# EAGLE board begin5matrix1.3whaha met snel makenjuhkuhjigb (EAGLE 5.06)
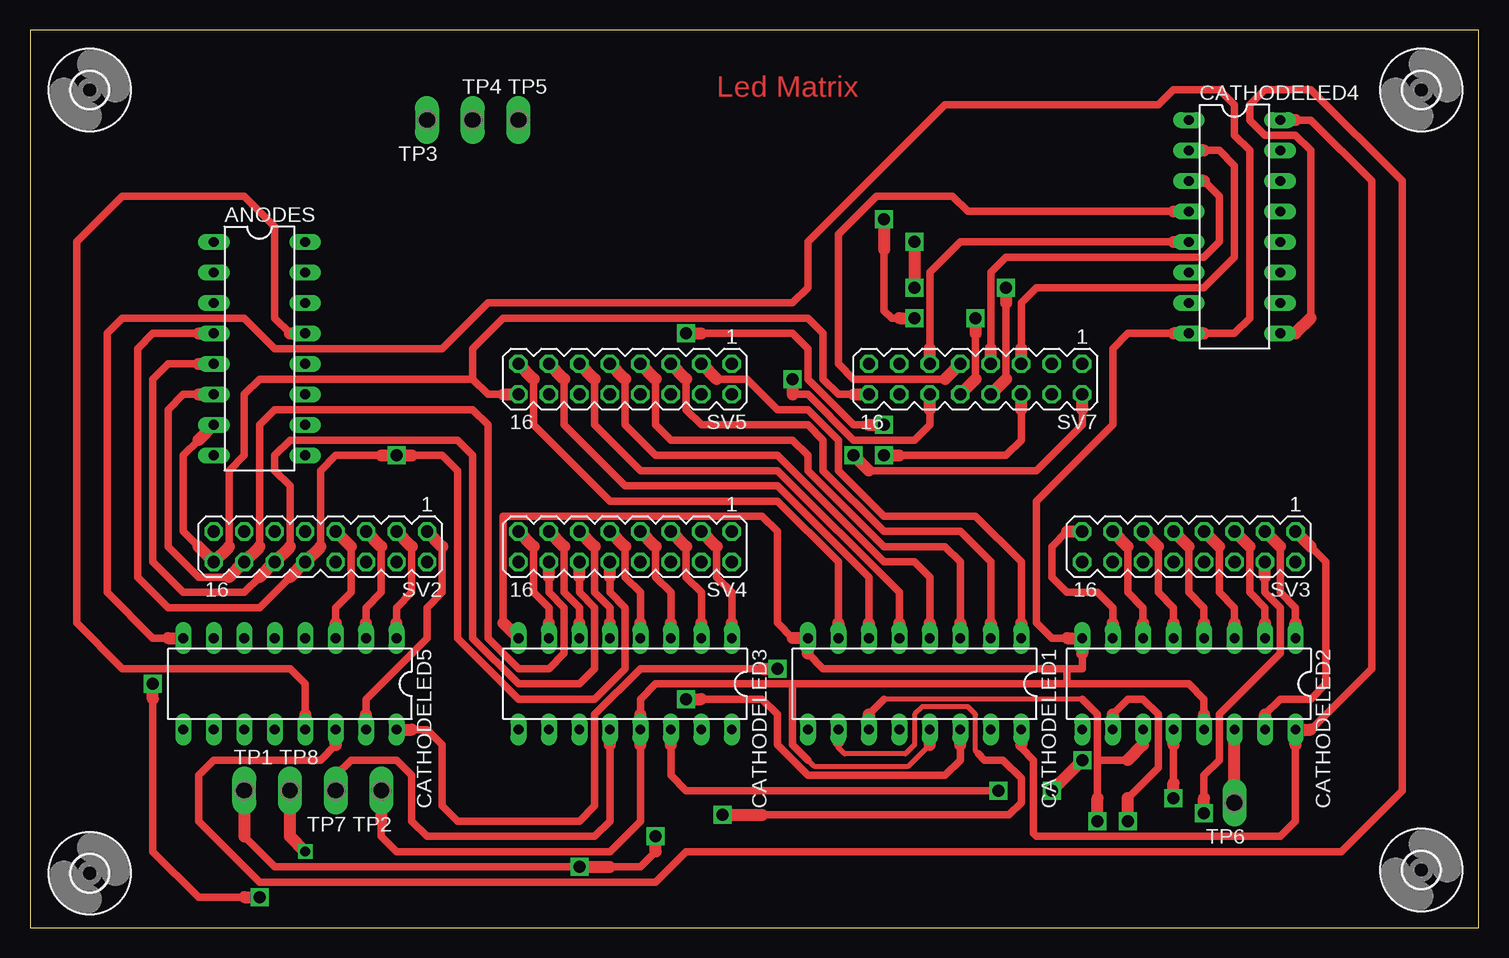
[diagram p0: board, top side]
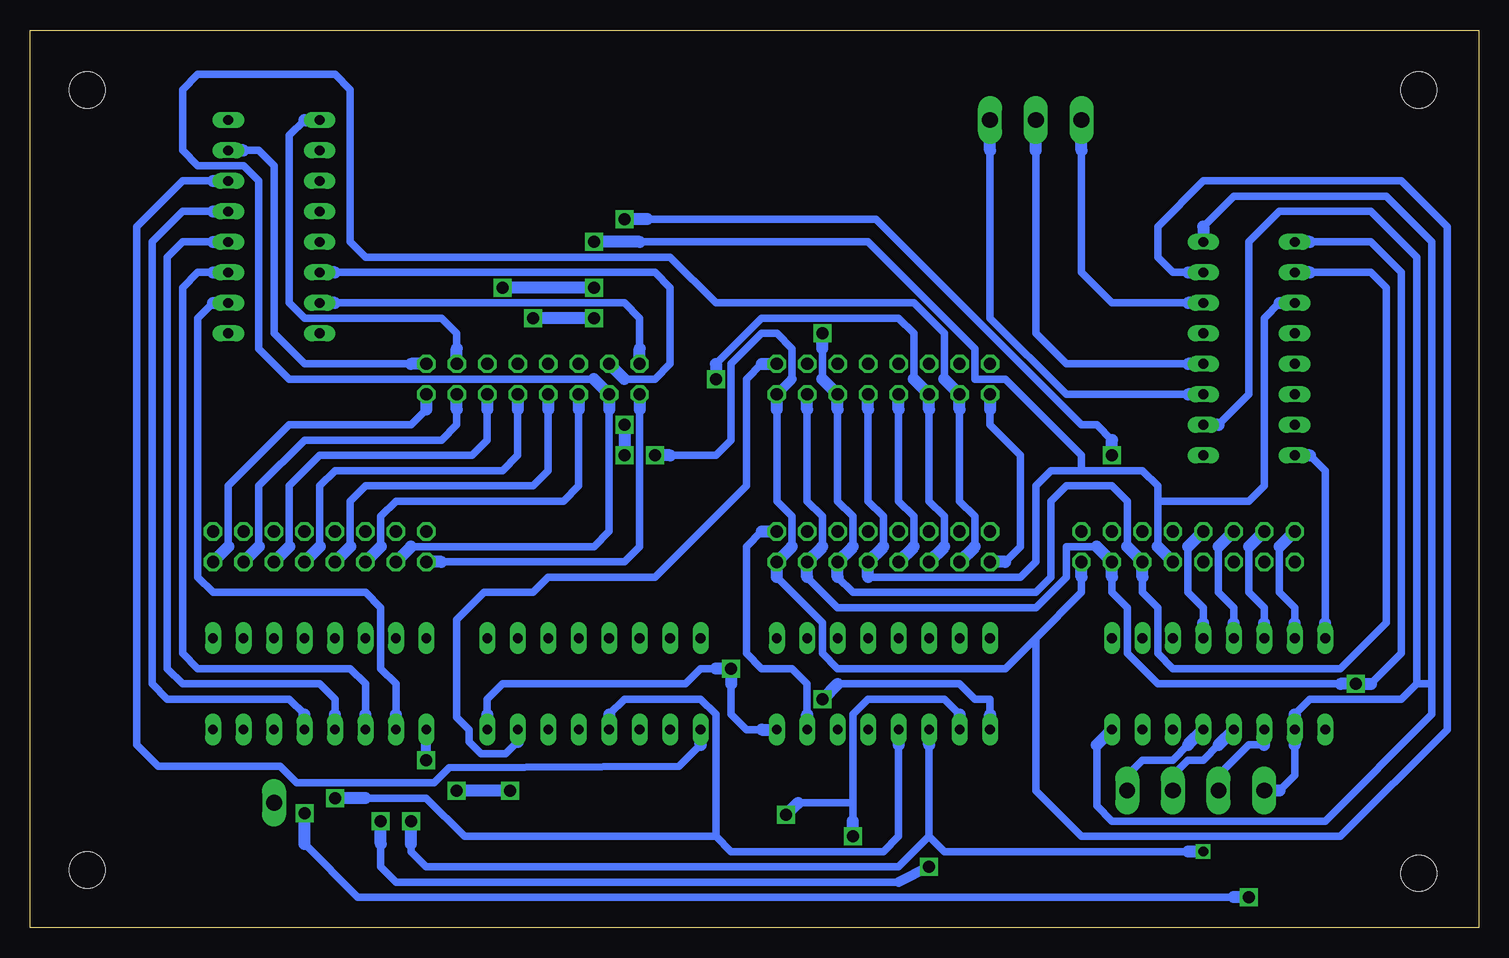
[diagram p1: board, bottom side, seen from below]

Size 120.75 x 74.81 mm. Coordinates in mm from the lower left corner, seen from the top.
Outline: 0,0 120.75,0 120.75,74.81 0,74.81 0,0
Copper layers (1*16): Top 0.035mm / dielectric 1.5mm / Bottom 0.035mm
Design rules "default": minimum track width 10mil, minimum drill 24mil, track to track 8mil, track to pad 8mil, pad to pad 8mil, via to via 8mil, smd to smd 8mil, copper to edge 40mil, drill to drill 8mil, minimum pad ring 10mil, minimum via ring 8mil, stop-mask expansion 4mil, vias tented up to drill 0mil, thermal gap 10mil

## Footprints (pad centres in the part's own frame; a part is rotated, then mirrored left to right if it is on the bottom)
DIL16 = drill 0.813 long: 1 -8.89,-3.81; 2 -6.35,-3.81; 3 -3.81,-3.81; 4 -1.27,-3.81; 5 1.27,-3.81; 6 3.81,-3.81; 7 6.35,-3.81; 8 8.89,-3.81; 9 8.89,3.81; 10 6.35,3.81; 11 3.81,3.81; 12 1.27,3.81; 13 -1.27,3.81; 14 -3.81,3.81; 15 -6.35,3.81; 16 -8.89,3.81
3,0 = hole 3: 0,0
MA08-2 = drill 1.016 octagon: 1 -8.89,-1.27; 2 -8.89,1.27; 3 -6.35,-1.27; 4 -6.35,1.27; 5 -3.81,-1.27; 6 -3.81,1.27; 7 -1.27,-1.27; 8 -1.27,1.27; 9 1.27,-1.27; 10 1.27,1.27; 11 3.81,-1.27; 12 3.81,1.27; 13 6.35,-1.27; 14 6.35,1.27; 15 8.89,-1.27; 16 8.89,1.27
P1-13Y = drill 1.321 pad 1.905 long: 1 0,0

## Placement (x,y rotation side)
ANODES  74HC595N  [DIL16]  19.13,48.26 270 top
CATHODELED1  74HC595N  [DIL16]  73.74,20.32 180 top
CATHODELED2  74HC595N  [DIL16]  96.6,20.32 180 top
CATHODELED3  74HC595N  [DIL16]  49.61,20.32 180 top
CATHODELED4  74HC595N  [DIL16]  100.41,58.42 270 top
CATHODELED5  74HC595N  [DIL16]  21.67,20.32 180 top
E$1  [3,0]  4.97,69.81 0 top
E$2  [3,0]  115.97,4.81 0 top
E$3  [3,0]  115.97,69.81 0 top
E$4  [3,0]  4.97,4.54 0 top
SV2  [MA08-2]  24.21,31.75 180 top
SV3  [MA08-2]  96.6,31.75 180 top
SV4  [MA08-2]  49.61,31.75 180 top
SV5  [MA08-2]  49.61,45.72 180 top
SV7  [MA08-2]  78.82,45.72 180 top
TP1  TPPAD1-13Y  [P1-13Y]  17.86,11.43 0 top
TP2  TPPAD1-13Y  [P1-13Y]  29.29,11.43 180 top
TP3  TPPAD1-13Y  [P1-13Y]  33.1,67.31 180 top
TP4  TPPAD1-13Y  [P1-13Y]  36.91,67.31 0 top
TP5  TPPAD1-13Y  [P1-13Y]  40.72,67.31 0 top
TP6  TPPAD1-13Y  [P1-13Y]  100.41,10.41 180 top
TP7  TPPAD1-13Y  [P1-13Y]  25.48,11.43 180 top
TP8  TPPAD1-13Y  [P1-13Y]  21.67,11.43 0 top

## Library data of the parts
ANODES CATHODELED1-CATHODELED5 = 74xx-eu
E$1-E$4 = holes
SV2-SV5 SV7 = con-lstb
TP1-TP8 = testpad

## Nets
GND: ANODES.8 CATHODELED1.8 CATHODELED2.8 CATHODELED3.8 CATHODELED4.8 CATHODELED5.8
N$1: ANODES.13 CATHODELED1.13 CATHODELED2.13 CATHODELED3.13 CATHODELED4.13 CATHODELED5.13 TP2.1
N$2: ANODES.10 CATHODELED1.10 CATHODELED2.10 CATHODELED3.10 CATHODELED4.10 CATHODELED5.10 TP1.1
N$3: ANODES.15 SV2.2 SV3.2 SV4.2 SV5.2 SV7.2
N$4: ANODES.1 SV2.4 SV3.4 SV4.4 SV5.4 SV7.4
N$5: ANODES.2 SV2.6 SV3.6 SV4.6 SV5.6 SV7.6
N$6: ANODES.3 SV2.8 SV3.8 SV4.8 SV5.8 SV7.8
N$7: ANODES.4 SV2.10 SV3.10 SV4.10 SV5.10 SV7.10
N$8: ANODES.5 SV2.12 SV3.12 SV4.12 SV5.12 SV7.12
N$9: ANODES.14 TP3.1
N$10: ANODES.6 SV2.14 SV3.14 SV4.14 SV5.14 SV7.14
N$11: ANODES.7 SV2.16 SV3.16 SV4.16 SV5.16 SV7.16
N$12: CATHODELED1.11 CATHODELED2.11 CATHODELED3.11 CATHODELED4.11 CATHODELED5.11 TP8.1
N$13: ANODES.11 TP5.1
N$14: ANODES.12 TP4.1
N$15: CATHODELED2.9 CATHODELED3.14
N$16: CATHODELED2.14 TP6.1
N$17: CATHODELED1.15 SV5.1
N$18: CATHODELED1.1 SV5.3
N$19: CATHODELED2.15 SV3.1
N$20: CATHODELED2.1 SV3.3
N$21: CATHODELED2.2 SV3.5
N$22: CATHODELED2.3 SV3.7
N$23: CATHODELED2.4 SV3.9
N$24: CATHODELED2.5 SV3.11
N$25: CATHODELED2.6 SV3.13
N$26: CATHODELED2.7 SV3.15
N$27: CATHODELED3.15 SV4.1
N$28: CATHODELED3.1 SV4.3
N$29: CATHODELED3.2 SV4.5
N$30: CATHODELED3.3 SV4.7
N$31: CATHODELED3.4 SV4.9
N$32: CATHODELED3.5 SV4.11
N$33: CATHODELED3.6 SV4.13
N$34: CATHODELED3.7 SV4.15
N$35: CATHODELED1.2 SV5.5
N$36: CATHODELED1.3 SV5.7
N$37: CATHODELED1.4 SV5.9
N$38: CATHODELED1.12 CATHODELED2.12 CATHODELED3.12 CATHODELED4.12 CATHODELED5.12 TP7.1
N$39: CATHODELED1.5 SV5.11
N$40: CATHODELED1.6 SV5.13
N$41: CATHODELED1.7 SV5.15
N$42: CATHODELED4.15 SV7.1
N$43: CATHODELED4.1 SV7.3
N$44: CATHODELED4.2 SV7.5
N$45: CATHODELED4.3 SV7.7
N$46: CATHODELED4.4 SV7.9
N$47: CATHODELED4.5 SV7.11
N$48: CATHODELED4.6 SV7.13
N$49: CATHODELED4.7 SV7.15
N$50: CATHODELED5.15 SV2.1
N$51: CATHODELED5.1 SV2.3
N$52: CATHODELED5.2 SV2.5
N$53: CATHODELED5.3 SV2.7
N$54: CATHODELED5.4 SV2.9
N$55: CATHODELED5.5 SV2.11
N$56: CATHODELED5.6 SV2.13
N$57: CATHODELED5.7 SV2.15
N$58: CATHODELED1.14 CATHODELED3.9
N$59: CATHODELED1.9 CATHODELED4.14
N$60: CATHODELED4.9 CATHODELED5.14
VCC: ANODES.16 CATHODELED1.16 CATHODELED2.16 CATHODELED3.16 CATHODELED4.16 CATHODELED5.16

## Tracks (layer width: path | path; a pad name or v marks a point on that pad's centre or on a via)
GND
  Top 0.61: 64.85,22.86 66.12,21.59 86.44,21.59 | 86.44,24.13 85.17,24.13 83.9,25.4 83.9,35.56 90.25,41.91 90.25,48.26 91.52,49.53 95.33,49.53 | 97.87,49.53 100.41,49.53 101.68,50.8 101.68,64.77 100.41,66.04 100.41,68.58 99.14,69.85 95.33,69.85 94.06,68.58 76.28,68.58 64.85,57.15 64.85,53.34 63.58,52.07 38.18,52.07 34.37,48.26 20.4,48.26 17.86,50.8 7.7,50.8 6.43,49.53 6.43,27.94 10.24,24.13 11.51,24.13 | 86.44,21.59 86.44,20.32 | 86.44,21.59 87.71,21.59 87.71,22.86 | 39.45,25.4 39.45,34.29 61.04,34.29 62.31,33.02 62.31,25.4 63.58,24.13
  Top 1.016: 95.33,49.53 CATHODELED4.8 97.87,49.53 | 86.44,24.13 CATHODELED2.8 87.71,22.86 | 64.85,22.86 CATHODELED1.8 63.58,24.13 | 11.51,24.13 CATHODELED5.8 | 39.45,25.4 CATHODELED3.8
  Bottom 0.61: 14.05,39.37 12.78,38.1 12.78,25.4
  Bottom 1.016: 14.05,39.37 ANODES.8 | CATHODELED5.8 12.78,25.4
N$1
  Top 0.406: 64.85,13.97 65.36,13.46 73.23,13.46 75.01,15.24
  Top 0.61: 21.67,49.53 20.4,50.8 20.4,58.42 17.86,60.96 7.7,60.96 3.89,57.15 3.89,25.4 7.7,21.59 21.67,21.59 22.94,20.32 22.94,17.78 | 29.29,8.89 29.29,7.62 30.56,6.35 48.34,6.35 50.88,8.89 50.88,15.24 | 97.87,17.78 97.87,19.05 96.6,20.32 63.58,20.32 | 63.58,20.32 52.15,20.32 50.88,19.05 50.88,17.78 | 64.85,13.97 63.58,15.24 63.58,20.32
  Top 1.016: 21.67,49.53 ANODES.13 | 22.94,17.78 CATHODELED5.13 | TP2.1 29.29,8.89 | 50.88,15.24 CATHODELED3.13 50.88,17.78 | 97.87,17.78 CATHODELED2.13 | 75.01,15.24 CATHODELED1.13
  Bottom 0.61: 97.87,17.78 99.14,19.05 109.3,19.05 110.57,20.32 110.57,57.15 108.03,59.69 105.49,59.69 | 24.21,15.24 25.48,13.97 28.02,13.97 29.29,12.7
  Bottom 1.016: CATHODELED2.13 97.87,17.78 | 105.49,59.69 CATHODELED4.13 | CATHODELED5.13 24.21,15.24 | 29.29,12.7 TP2.1
N$2  (via drill 1)
  Top 0.406: 67.39,15.49 67.39,14.99 67.9,14.48 72.98,14.48 73.74,15.24 73.74,17.78 74.38,18.41 78.19,18.41 78.82,17.78 78.82,14.73 79.07,14.48
  Top 0.61: 17.86,7.62 20.4,5.08 v45.8,5.08 | 52.15,6.35 50.88,5.08 48.34,5.08 | 91.52,10.79 94.06,13.34 94.06,17.78 92.79,19.05 91.52,19.05 90.25,17.78 | 79.07,14.48 79.58,13.97 81.11,13.97 82.63,12.45 82.63,10.41 81.61,9.4 61.04,9.4
  Top 1.016: 17.86,10.16 TP1.1 17.86,7.62 | 52.15,6.35 v52.15,7.62 | v91.52,8.89 91.52,10.79 | 90.25,17.78 CATHODELED2.10 | v45.8,5.08 48.34,5.08 | 67.39,15.49 CATHODELED1.10 | v57.74,9.4 61.04,9.4
  Bottom 0.61: 105.49,52.07 106.76,50.8 106.76,29.21 105.49,27.94 92.79,27.94 91.52,26.67 91.52,21.59 90.25,20.32 90.25,17.78 | 21.67,41.91 19.13,44.45 19.13,57.15 16.59,59.69 8.97,59.69 5.16,55.88 5.16,20.32 | 15.32,17.78 14.05,19.05 6.43,19.05 5.16,20.32 | 15.32,15.24 15.32,12.7 16.59,11.43 | 43.26,17.78 44.53,19.05 50.88,19.05 52.15,17.78 52.15,10.41 | 52.15,8.89 52.15,10.41 | 91.52,6.98 91.52,5.08 90.25,3.81 48.34,3.81 | 52.15,10.41 56.72,10.41 | 3.89,19.05 3.89,20.32 5.16,20.32
  Bottom 0.813: v45.8,5.08 48.34,3.81
  Bottom 1.016: 105.49,52.07 CATHODELED4.10 | CATHODELED2.10 90.25,17.78 | 21.67,41.91 ANODES.10 | 15.32,17.78 CATHODELED5.10 15.32,15.24 | 16.59,11.43 TP1.1 | 43.26,17.78 CATHODELED3.10 | v52.15,7.62 52.15,8.89 | 91.52,6.98 v91.52,8.89 | 56.72,10.41 v57.74,9.4
N$3  (via drill 1)
  Top 0.61: 69.93,38.1 83.9,38.1 87.71,41.91 87.71,43.18
  Top 1.016: v68.66,39.37 69.93,38.1 | 87.71,43.18 SV7.2
  Bottom 0.61: 57.23,31.75 57.23,34.29 58.5,35.56 58.5,43.18 | 87.71,43.18 88.98,41.91 99.14,41.91 104.22,36.83 104.22,31.75 | 33.1,29.21 33.1,27.94 36.91,24.13 | 36.91,24.13 39.45,21.59 53.42,21.59 54.69,22.86 54.69,25.4 58.5,29.21 | 24.21,54.61 25.48,54.61 26.75,55.88 26.75,58.42 22.94,62.23 6.43,62.23 2.62,58.42 2.62,16.51 11.51,7.62 33.1,7.62 36.91,11.43 36.91,24.13 | 67.39,39.37 63.58,39.37 62.31,40.64 62.31,46.99 59.77,49.53 58.5,49.53 57.23,48.26 57.23,45.72
  Bottom 0.813: SV5.2 57.23,45.72
  Bottom 1.016: 57.23,31.75 SV4.2 58.5,29.21 | 58.5,43.18 SV5.2 | SV7.2 87.71,43.18 | 104.22,31.75 SV3.2 | 33.1,29.21 SV2.2 | 24.21,54.61 ANODES.15 | 67.39,39.37 v68.66,39.37
N$4  (via drill 1)
  Top 0.61: 97.87,10.79 97.87,12.7 99.14,13.97 99.14,17.78 104.22,22.86 104.22,26.67 102.95,27.94 102.95,29.21 | 10.24,19.05 10.24,6.35 14.05,2.54 17.86,2.54
  Top 1.016: 102.95,29.21 SV3.4 | 10.24,19.05 v10.24,20.32 | 17.86,2.54 v19.13,2.54 | v97.87,9.53 97.87,10.79
  Bottom 0.61: 54.69,31.75 54.69,34.29 55.96,35.56 55.96,43.18 | 85.17,43.18 85.17,41.91 86.44,40.64 97.87,40.64 101.68,36.83 101.68,31.75 | 31.83,31.75 34.37,31.75 34.37,29.21 36.91,26.67 53.42,26.67 55.96,29.21 | 14.05,57.15 8.97,57.15 6.43,54.61 6.43,22.86 8.97,20.32 | 30.56,29.21 30.56,27.94 29.29,26.67 29.29,22.86 26.75,20.32 11.51,20.32 | 97.87,6.98 93.42,2.54 20.4,2.54
  Bottom 1.016: 54.69,31.75 SV4.4 55.96,29.21 | 55.96,43.18 SV5.4 | 85.17,43.18 SV7.4 | SV3.4 101.68,31.75 | 31.83,31.75 SV2.4 30.56,29.21 | 14.05,57.15 ANODES.1 | v19.13,2.54 20.4,2.54 | 11.51,20.32 v10.24,20.32 8.97,20.32 | 97.87,6.98 v97.87,9.53
N$5  (via drill 1)
  Top 0.61: 82.63,43.18 82.63,40.64 81.36,39.37 72.47,39.37 | 69.93,41.91 68.66,41.91 64.85,45.72 64.85,48.26 63.58,49.53 55.96,49.53
  Top 1.016: 82.63,43.18 SV7.6 | v71.2,39.37 72.47,39.37 | 69.93,41.91 v71.2,41.91 | v54.69,49.53 55.96,49.53
  Bottom 0.61: 52.15,31.75 52.15,34.29 53.42,35.56 53.42,43.18 | 82.63,43.18 82.63,40.64 83.9,39.37 96.6,39.37 99.14,36.83 99.14,31.75 | 29.29,31.75 29.29,35.56 30.56,36.83 34.37,36.83 35.64,35.56 35.64,29.21 36.91,27.94 52.15,27.94 53.42,29.21 | 14.05,54.61 8.97,54.61 7.7,53.34 7.7,25.4 11.51,21.59 25.48,21.59 26.75,22.86 26.75,26.67 28.02,27.94 28.02,29.21 | 54.69,45.72 54.69,48.26
  Bottom 1.016: 52.15,31.75 SV4.6 53.42,29.21 | 53.42,43.18 SV5.6 54.69,45.72 | SV7.6 82.63,43.18 | 99.14,31.75 SV3.6 | 29.29,31.75 SV2.6 28.02,29.21 | 14.05,54.61 ANODES.2 | v71.2,41.91 v71.2,39.37 | 54.69,48.26 v54.69,49.53
N$6  (via drill 1)
  Top 0.61: 81.36,52.07 81.36,45.72
  Top 1.016: 81.36,45.72 SV7.8 | v81.36,53.34 81.36,52.07 | v73.74,57.15 v73.74,53.34
  Bottom 0.61: 49.61,31.75 49.61,34.29 50.88,35.56 50.88,43.18 | 80.09,43.18 80.09,39.37 81.36,38.1 95.33,38.1 96.6,36.83 96.6,31.75 | 26.75,31.75 26.75,35.56 | 26.75,35.56 26.75,36.83 28.02,38.1 33.1,38.1 | 33.1,38.1 35.64,38.1 36.91,36.83 36.91,30.48 38.18,29.21 50.88,29.21 | 16.59,52.07 17.86,50.8 17.86,36.83 19.13,35.56 26.75,35.56 | 69.93,57.15 50.88,57.15 41.99,48.26 41.99,45.72 39.45,45.72 33.1,39.37 33.1,38.1
  Bottom 1.016: 49.61,31.75 SV4.8 50.88,29.21 | 50.88,43.18 SV5.8 | SV7.8 80.09,43.18 | 96.6,31.75 SV3.8 | SV2.8 26.75,31.75 | 16.59,52.07 ANODES.3 | v73.74,53.34 v81.36,53.34 | 69.93,57.15 v73.74,57.15
N$7  (via drill 1)
  Top 0.61: 14.05,49.53 10.24,49.53 8.97,48.26 8.97,29.21 11.51,26.67 19.13,26.67 21.67,29.21 | 24.21,31.75 24.21,38.1 25.48,39.37 29.29,39.37 | 48.34,29.21 48.34,27.94 49.61,26.67 49.61,21.59 47.07,19.05 40.72,19.05 35.64,24.13 35.64,38.1 34.37,39.37 31.83,39.37 | 78.82,49.53 78.82,45.72 | 72.47,50.8 71.84,50.8 71.2,51.44 71.2,56.52
  Top 1.016: 14.05,49.53 ANODES.4 | 21.67,29.21 SV2.10 24.21,31.75 | 48.34,29.21 SV4.10 | 78.82,45.72 SV7.10 | v78.82,50.8 78.82,49.53 | 72.47,50.8 v73.74,50.8 | v71.2,59.05 71.2,56.52 | 29.29,39.37 v30.56,39.37 31.83,39.37
  Bottom 0.61: 47.07,31.75 47.07,34.29 48.34,35.56 48.34,43.18 | 77.55,43.18 77.55,38.1 78.82,36.83 92.79,36.83 94.06,35.56 94.06,31.75 | 69.3,59.05 50.24,59.05 33.1,41.91 31.83,41.91 30.56,40.64
  Bottom 1.016: SV4.10 47.07,31.75 | 48.34,43.18 SV5.10 | SV7.10 77.55,43.18 | 94.06,31.75 SV3.10 | v73.74,50.8 v78.82,50.8 | 69.3,59.05 v71.2,59.05 | v30.56,39.37 30.56,40.64
N$8  (via drill 1)
  Top 0.61: 14.05,46.99 11.51,46.99 10.24,45.72 10.24,30.48 12.78,27.94 17.86,27.94 19.13,29.21 | 21.67,31.75 21.67,36.83 20.4,38.1 20.4,39.37 21.67,40.64 35.64,40.64 36.91,39.37 36.91,24.13 40.72,20.32 45.8,20.32 47.07,21.59 47.07,26.67 45.8,27.94 45.8,29.21 | 75.01,43.18 75.01,41.91 73.74,40.64 68.66,40.64 64.85,44.45 63.58,44.45
  Top 1.016: 14.05,46.99 ANODES.5 | 19.13,29.21 SV2.12 21.67,31.75 | 45.8,29.21 SV4.12 | 75.01,43.18 SV7.12 | v63.58,45.72 63.58,44.45
  Bottom 0.61: 44.53,31.75 44.53,34.29 45.8,35.56 45.8,43.18 | 75.01,43.18 75.01,36.83 76.28,35.56 90.25,35.56 91.52,34.29 91.52,31.75 | 47.07,45.72 47.07,49.53 48.34,50.8 59.77,50.8 63.58,46.99
  Bottom 1.016: SV4.12 44.53,31.75 | 45.8,43.18 SV5.12 47.07,45.72 | SV7.12 75.01,43.18 | 91.52,31.75 SV3.12 | 63.58,46.99 v63.58,45.72
N$9
  Bottom 0.61: 33.1,64.77 33.1,54.61 30.56,52.07 24.21,52.07
  Bottom 1.016: 33.1,64.77 TP3.1 | ANODES.14 24.21,52.07
N$10
  Top 0.61: 16.59,29.21 14.05,29.21 11.51,31.75 11.51,43.18 12.78,44.45 14.05,44.45 | 19.13,31.75 19.13,41.91 20.4,43.18 36.91,43.18 38.18,41.91 38.18,24.13 40.72,21.59 43.26,21.59 44.53,22.86 44.53,26.67 43.26,27.94 43.26,29.21
  Top 1.016: 14.05,44.45 ANODES.6 | 16.59,29.21 SV2.14 19.13,31.75 | 43.26,29.21 SV4.14
  Bottom 0.61: 41.99,31.75 41.99,34.29 43.26,35.56 43.26,43.18 | 72.47,43.18 72.47,33.02 73.74,31.75 88.98,31.75 | 73.74,45.72 99.14,45.72 101.68,48.26 101.68,62.23 102.95,63.5 106.76,63.5 108.03,64.77 108.03,69.85 106.76,71.12 95.33,71.12 94.06,69.85 94.06,57.15 92.79,55.88 67.39,55.88 63.58,52.07 47.07,52.07 44.53,49.53 44.53,45.72
  Bottom 1.016: SV4.14 41.99,31.75 | 72.47,43.18 SV7.14 73.74,45.72 | 88.98,31.75 SV3.14 | 43.26,43.18 SV5.14 44.53,45.72
N$11
  Top 0.61: 14.05,31.75 12.78,33.02 12.78,39.37 14.05,40.64 | 39.45,44.45 38.18,44.45 36.91,45.72 | 36.91,45.72 36.91,48.26 39.45,50.8 64.85,50.8 66.12,49.53 66.12,45.72 67.39,44.45 68.66,44.45 | 16.59,31.75 16.59,38.1 17.86,39.37 17.86,44.45 19.13,45.72 36.91,45.72
  Top 1.016: 14.05,31.75 SV2.16 16.59,31.75 | 14.05,40.64 ANODES.7 | 39.45,44.45 SV5.16 | 68.66,44.45 SV7.16
  Bottom 0.61: 39.45,30.48 38.18,31.75 38.18,39.37 40.72,41.91 40.72,43.18 | 69.93,43.18 69.93,31.75 71.2,30.48 86.44,30.48
  Bottom 1.016: 39.45,30.48 SV4.16 | SV7.16 69.93,43.18 | 86.44,30.48 SV3.16 | SV5.16 40.72,43.18
N$12  (via drill 0.8, 1)
  Top 0.406: 87.71,19.05 71.2,19.05
  Top 0.61: 88.98,13.97 91.52,13.97 | 88.98,13.97 88.98,17.78 87.71,19.05 | 71.2,19.05 69.93,17.78 | 88.98,10.79 88.98,13.97
  Top 1.016: CATHODELED2.11 92.79,15.24 91.52,13.97 | 69.93,17.78 CATHODELED1.11 | TP8.1 21.67,7.62 v22.94,6.35 | v88.98,8.89 88.98,10.79
  Bottom 0.254: 80.09,5.08 81.36,5.08
  Bottom 0.61: 92.79,17.78 92.79,20.32 94.06,21.59 106.76,21.59 108.03,22.86 108.03,53.34 106.76,54.61 105.49,54.61 | 17.86,15.24 19.13,15.24 21.67,12.7 | 45.8,7.62 45.8,15.24 | 45.8,7.62 44.53,6.35 24.21,6.35 | 45.8,7.62 48.34,5.08 80.09,5.08 87.71,5.08 88.98,6.35 88.98,6.98
  Bottom 1.016: CATHODELED2.11 92.79,17.78 | 105.49,54.61 CATHODELED4.11 | 17.86,15.24 CATHODELED5.11 | TP8.1 21.67,12.7 | 45.8,15.24 CATHODELED3.11 | v22.94,6.35 24.21,6.35 | 88.98,6.98 v88.98,8.89
N$13
  Bottom 0.61: 24.21,44.45 34.37,44.45 40.72,50.8 40.72,64.77
  Bottom 1.016: ANODES.11 24.21,44.45 | 40.72,64.77 TP5.1
N$14
  Bottom 0.61: 36.91,64.77 36.91,49.53 34.37,46.99 24.21,46.99
  Bottom 1.016: 36.91,64.77 TP4.1 | ANODES.12 24.21,46.99
N$15  (via drill 1)
  Top 0.61: 53.42,15.24 53.42,12.7 54.69,11.43 v80.72,11.43
  Top 1.016: 53.42,15.24 CATHODELED3.14 | v85.17,11.43 v87.71,13.97
  Bottom 0.813: v87.71,13.97 CATHODELED2.9
  Bottom 1.016: v80.72,11.43 v85.17,11.43
N$16
  Top 1.016: TP6.1 CATHODELED2.14
N$17
  Bottom 0.61: 59.77,46.99 61.04,45.72 61.04,36.83 68.66,29.21 77.55,29.21 78.82,27.94 82.88,27.94 85.17,25.65 85.17,17.53 84.15,16.51 84.15,15.49 83.14,14.48 81.11,14.48 80.09,15.49
  Bottom 1.016: 59.77,46.99 SV5.1 | 80.09,15.49 CATHODELED1.15
N$18
  Top 0.61: 82.63,25.4 82.63,30.48 78.82,34.29 71.2,34.29 67.39,38.1 67.39,40.64 64.85,43.18 62.31,43.18 59.77,45.72 57.23,45.72
  Top 1.016: 82.63,25.4 CATHODELED1.1 | SV5.3 57.23,45.72
N$19
  Top 0.61: 106.76,31.75 108.03,30.48 108.03,20.32 106.76,19.05 104.22,19.05 102.95,17.78
  Top 1.016: 106.76,31.75 SV3.1 | CATHODELED2.15 102.95,17.78
N$20
  Top 0.61: 104.22,31.75 104.22,27.94 105.49,26.67 105.49,25.4
  Top 1.016: 104.22,31.75 SV3.3 | CATHODELED2.1 105.49,25.4
N$21
  Top 0.61: 101.68,31.75 101.68,27.94 102.95,26.67 102.95,25.4
  Top 1.016: 101.68,31.75 SV3.5 | CATHODELED2.2 102.95,25.4
N$22
  Top 0.61: 99.14,31.75 99.14,27.94 100.41,26.67 100.41,25.4
  Top 1.016: 99.14,31.75 SV3.7 | CATHODELED2.3 100.41,25.4
N$23
  Top 0.61: 96.6,31.75 96.6,27.94 97.87,26.67 97.87,25.4
  Top 1.016: 96.6,31.75 SV3.9 | CATHODELED2.4 97.87,25.4
N$24
  Top 0.61: 94.06,31.75 94.06,27.94 95.33,26.67 95.33,25.4
  Top 1.016: 94.06,31.75 SV3.11 | CATHODELED2.5 95.33,25.4
N$25
  Top 0.61: 91.52,31.75 91.52,27.94 92.79,26.67 92.79,25.4
  Top 1.016: 91.52,31.75 SV3.13 | CATHODELED2.6 92.79,25.4
N$26
  Top 0.61: 86.44,33.02 85.17,31.75 85.17,29.21 86.44,27.94 88.98,27.94 90.25,26.67 90.25,25.4
  Top 1.016: 86.44,33.02 SV3.15 | 90.25,25.4 CATHODELED2.7
N$27
  Bottom 0.61: 59.77,33.02 61.04,31.75 61.04,22.86 59.77,21.59 57.23,21.59 55.96,20.32 55.96,17.78
  Bottom 1.016: 59.77,33.02 SV4.1 | CATHODELED3.15 55.96,17.78
N$28
  Top 0.61: 58.5,25.4 58.5,27.94 57.23,29.21 57.23,31.75
  Top 1.016: CATHODELED3.1 58.5,25.4 | 57.23,31.75 SV4.3
N$29
  Top 0.61: 55.96,25.4 55.96,27.94 54.69,29.21 54.69,31.75
  Top 1.016: CATHODELED3.2 55.96,25.4 | 54.69,31.75 SV4.5
N$30
  Top 0.61: 53.42,25.4 53.42,27.94 52.15,29.21 52.15,31.75
  Top 1.016: CATHODELED3.3 53.42,25.4 | 52.15,31.75 SV4.7
N$31
  Top 0.61: 50.88,25.4 50.88,27.94 49.61,29.21 49.61,31.75
  Top 1.016: CATHODELED3.4 50.88,25.4 | 49.61,31.75 SV4.9
N$32
  Top 0.61: 48.34,25.4 48.34,26.67 47.07,27.94 47.07,31.75
  Top 1.016: CATHODELED3.5 48.34,25.4 | 47.07,31.75 SV4.11
N$33
  Top 0.61: 44.53,31.75 44.53,27.94 45.8,26.67 45.8,25.4
  Top 1.016: CATHODELED3.6 45.8,25.4 | 44.53,31.75 SV4.13
N$34
  Top 0.61: 43.26,25.4 43.26,26.67 41.99,27.94 41.99,31.75
  Top 1.016: CATHODELED3.7 43.26,25.4 | 41.99,31.75 SV4.15
N$35
  Top 0.61: 80.09,25.4 80.09,30.48 77.55,33.02 71.2,33.02 66.12,38.1 66.12,40.64 64.85,41.91 55.96,41.91 54.69,43.18 54.69,45.72
  Top 1.016: 80.09,25.4 CATHODELED1.2 | 54.69,45.72 SV5.5
N$36
  Top 0.61: 77.55,25.4 77.55,30.48 76.28,31.75 71.2,31.75 64.85,38.1 64.85,39.37 63.58,40.64 53.42,40.64 52.15,41.91 52.15,45.72
  Top 1.016: 77.55,25.4 CATHODELED1.3 | 52.15,45.72 SV5.7
N$37
  Top 0.61: 75.01,25.4 75.01,29.21 73.74,30.48 71.2,30.48 62.31,39.37 52.15,39.37 49.61,41.91 49.61,45.72
  Top 1.016: 75.01,25.4 CATHODELED1.4 | 49.61,45.72 SV5.9
N$38  (via drill 1)
  Top 0.61: 48.34,15.24 48.34,8.89 47.07,7.62 33.1,7.62 31.83,8.89 31.83,12.7 30.56,13.97 26.75,13.97 25.48,12.7 | 95.33,12.07 95.33,15.24
  Top 1.016: 48.34,15.24 CATHODELED3.12 | TP7.1 25.48,12.7 | 95.33,15.24 CATHODELED2.12 | v95.33,10.79 95.33,12.07
  Bottom 0.61: 95.33,17.78 95.33,19.05 96.6,20.32 108.03,20.32 109.3,21.59 109.3,55.88 108.03,57.15 105.49,57.15 | 25.48,12.7 24.21,13.97 22.94,13.97 21.67,15.24 | 72.47,17.78 71.2,19.05 64.85,19.05 63.58,17.78 63.58,7.62 | 63.58,7.62 84.53,7.62 87.71,10.79 92.79,10.79 | 63.58,7.62 62.31,6.35 49.61,6.35 48.34,7.62 48.34,15.24
  Bottom 1.016: CATHODELED2.12 95.33,17.78 | 105.49,57.15 CATHODELED4.12 | TP7.1 25.48,12.7 | 21.67,15.24 CATHODELED5.12 | 72.47,17.78 CATHODELED1.12 | 92.79,10.79 v95.33,10.79 | CATHODELED3.12 48.34,15.24
N$39
  Top 0.61: 47.07,45.72 47.07,41.91 50.88,38.1 62.31,38.1 72.47,27.94 72.47,25.4
  Top 1.016: 47.07,45.72 SV5.11 | 72.47,25.4 CATHODELED1.5
N$40
  Top 0.61: 44.53,45.72 44.53,41.91 49.61,36.83 62.31,36.83 69.93,29.21 69.93,25.4
  Top 1.016: 44.53,45.72 SV5.13 | 69.93,25.4 CATHODELED1.6
N$41
  Top 0.61: 41.99,45.72 41.99,41.91 48.34,35.56 62.31,35.56 67.39,30.48 67.39,25.4
  Top 1.016: 41.99,45.72 SV5.15 | 67.39,25.4 CATHODELED1.7
N$42
  Bottom 0.61: 88.98,46.99 97.87,46.99 100.41,49.53 100.41,63.5 101.68,64.77 102.95,64.77
  Bottom 1.016: SV7.1 88.98,46.99 | 102.95,64.77 CATHODELED4.15
N$43
  Bottom 0.61: 97.87,67.31 99.14,66.04 99.14,52.07 97.87,50.8 86.44,50.8 85.17,49.53 85.17,48.26
  Bottom 1.016: 97.87,67.31 CATHODELED4.1 | SV7.3 85.17,48.26
N$44
  Top 0.61: 97.87,64.77 99.14,64.77 100.41,63.5 100.41,55.88 97.87,53.34 83.9,53.34 82.63,52.07 82.63,48.26
  Top 1.016: 97.87,64.77 CATHODELED4.2 | SV7.5 82.63,48.26
N$45
  Top 0.61: 97.87,62.23 99.14,60.96 99.14,57.15 97.87,55.88 81.36,55.88 80.09,54.61 80.09,48.26
  Top 1.016: 97.87,62.23 CATHODELED4.3 | SV7.7 80.09,48.26
N$46
  Top 0.61: 76.28,45.72 68.66,45.72 67.39,46.99 67.39,57.79 70.56,60.96 76.91,60.96 78.19,59.69 95.33,59.69
  Top 1.016: 76.28,45.72 SV7.9 | 95.33,59.69 CATHODELED4.4
N$47
  Top 0.61: 75.01,48.26 75.01,54.61 77.55,57.15 95.33,57.15
  Top 1.016: SV7.11 75.01,48.26 | 95.33,57.15 CATHODELED4.5
N$48
  Bottom 0.61: 71.2,45.72 68.66,45.72 67.39,46.99 67.39,53.34 68.66,54.61 95.33,54.61
  Bottom 1.016: 71.2,45.72 SV7.13 | 95.33,54.61 CATHODELED4.6
N$49
  Bottom 0.61: 69.93,48.26 69.93,50.8 71.2,52.07 95.33,52.07
  Bottom 1.016: SV7.15 69.93,48.26 | 95.33,52.07 CATHODELED4.7
N$50
  Top 0.61: 34.37,31.75 34.37,27.94 33.1,26.67 33.1,24.13 28.02,19.05 28.02,17.78
  Top 1.016: 34.37,31.75 SV2.1 | CATHODELED5.15 28.02,17.78
N$51
  Top 0.61: 31.83,31.75 31.83,27.94 30.56,26.67 30.56,25.4
  Top 1.016: 31.83,31.75 SV2.3 | CATHODELED5.1 30.56,25.4
N$52
  Top 0.61: 29.29,31.75 29.29,27.94 28.02,26.67 28.02,25.4
  Top 1.016: 29.29,31.75 SV2.5 | CATHODELED5.2 28.02,25.4
N$53
  Top 0.61: 26.75,31.75 26.75,27.94 25.48,26.67 25.48,25.4
  Top 1.016: 26.75,31.75 SV2.7 | CATHODELED5.3 25.48,25.4
N$54
  Bottom 0.61: 24.21,31.75 24.21,27.94 22.94,26.67 22.94,25.4
  Bottom 1.016: 24.21,31.75 SV2.9 | CATHODELED5.4 22.94,25.4
N$55
  Bottom 0.61: 21.67,31.75 21.67,27.94 20.4,26.67 20.4,25.4
  Bottom 1.016: 21.67,31.75 SV2.11 | CATHODELED5.5 20.4,25.4
N$56
  Bottom 0.61: 19.13,31.75 19.13,27.94 17.86,26.67 17.86,25.4
  Bottom 1.016: 19.13,31.75 SV2.13 | CATHODELED5.6 17.86,25.4
N$57
  Bottom 0.61: 16.59,31.75 16.59,27.94 15.32,26.67 15.32,25.4
  Bottom 1.016: 16.59,31.75 SV2.15 | CATHODELED5.7 15.32,25.4
N$58  (via drill 1)
  Top 0.61: 55.96,19.05 61.04,19.05 62.31,17.78 62.31,15.24 64.85,12.7 76.28,12.7 77.55,13.97 77.55,15.24
  Top 1.016: v54.69,19.05 55.96,19.05 | 77.55,15.24 CATHODELED1.14
  Bottom 0.61: 53.42,20.32 43.26,20.32 41.99,19.05 40.72,19.05 40.72,17.78
  Bottom 1.016: 53.42,20.32 v54.69,19.05 | CATHODELED3.9 40.72,17.78
N$59
  Bottom 0.61: 105.49,62.23 108.03,62.23 111.84,58.42 111.84,15.24 110.06,13.46 99.9,13.46 98.5,12.07 87.08,12.07 85.8,13.34 66.63,13.46 64.85,15.24
  Bottom 1.016: 105.49,62.23 CATHODELED4.14 | 64.85,15.24 CATHODELED1.9
N$60
  Top 0.61: 25.48,15.24 24.21,13.97 15.32,13.97 14.05,12.7 14.05,8.89 19.13,3.81 52.15,3.81 54.69,6.35 109.3,6.35 114.38,11.43 114.38,62.23 106.76,69.85 102.95,69.85 101.68,68.58 101.68,67.31 102.95,66.04 105.49,66.04 106.76,64.77 106.76,50.8
  Top 1.016: 25.48,15.24 CATHODELED5.14 | CATHODELED4.9 105.49,49.53 106.76,50.8
VCC  (via drill 1)
  Top 0.61: 105.49,67.31 106.76,67.31 111.84,62.23 111.84,21.59 106.76,16.51 | 31.83,16.51 33.1,16.51 34.37,15.24 34.37,10.16 35.64,8.89 45.8,8.89 47.07,10.16 47.07,17.78 50.88,21.59 61.04,21.59 | 105.49,15.24 105.49,8.89 104.22,7.62 83.9,7.62 83.65,7.87 83.65,13.97 82.63,14.99 82.63,15.24
  Top 1.016: 105.49,67.31 CATHODELED4.16 | 106.76,16.51 CATHODELED2.16 105.49,15.24 | CATHODELED5.16 31.83,16.51 | 61.04,21.59 v62.31,21.59 | CATHODELED1.16 82.63,15.24
  Bottom 0.61: 82.63,17.78 82.63,19.05 81.36,20.32 66.12,20.32 64.85,21.59 63.58,21.59 | 59.77,16.51 61.04,16.51 62.31,17.78 62.31,20.32 | 31.83,15.24 31.83,10.16 30.56,8.89 12.78,8.89 3.89,17.78 3.89,57.15 7.7,60.96 20.4,60.96 22.94,58.42
  Bottom 1.016: 82.63,17.78 CATHODELED1.16 | 59.77,16.51 CATHODELED3.16 | 63.58,21.59 v62.31,21.59 62.31,20.32 | 31.83,15.24 CATHODELED5.16 | 22.94,58.42 ANODES.16

## Text on the board
Top: Led Matrix